# EAGLE board Passthrough Meter (EAGLE 5.06)
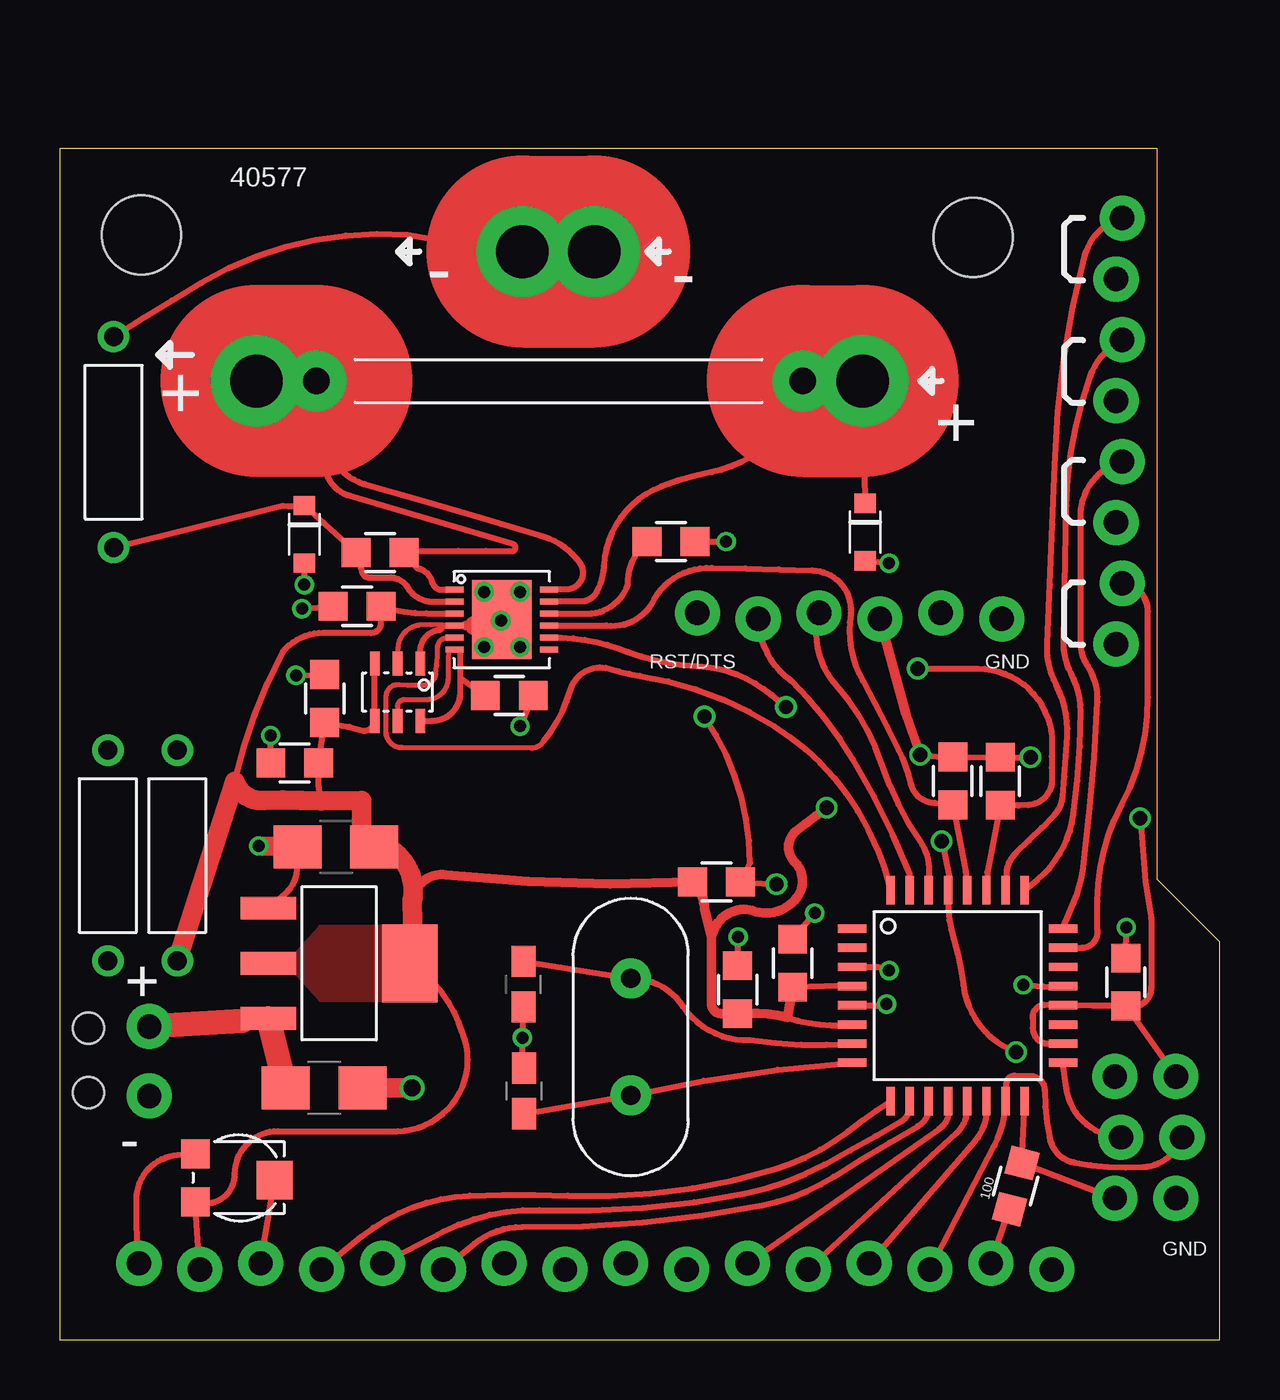
[diagram p0: board, top side]
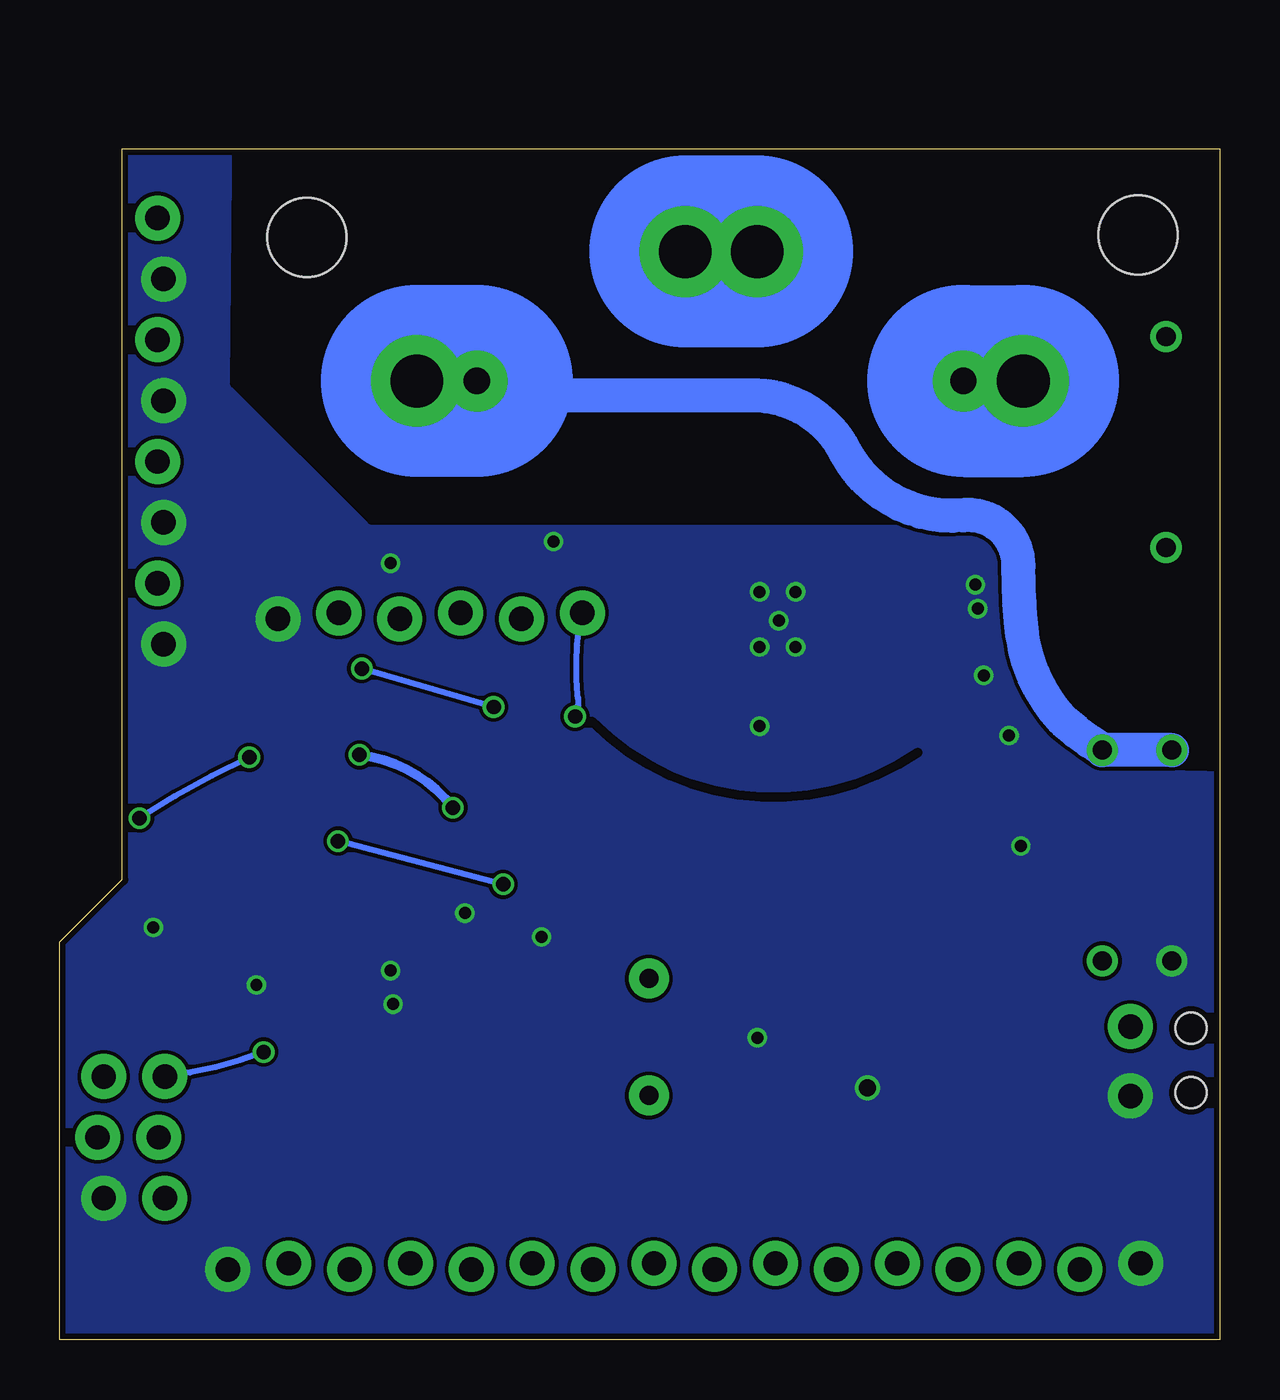
[diagram p1: board, bottom side, seen from below]

Size 48.4 x 49.7 mm. Coordinates in mm from the lower left corner, seen from the top.
Outline: 0,0 48.4,0 48.4,16.6 45.8,19.2 45.8,49.7 0,49.7 0,0
Copper layers (1*16): Top 0.035mm / dielectric 1.5mm / Bottom 0.035mm
Design rules "Fusion_eagle_rule_v1.1": minimum track width 6mil, minimum drill 12mil, track to track 6mil, track to pad 6mil, pad to pad 6mil, via to via 6mil, smd to smd 0mil, copper to edge 10mil, drill to drill 10mil, minimum pad ring 10mil, minimum via ring 6mil, stop-mask expansion 2mil, vias tented up to drill 100mil, thermal gap 10mil
Holes 1.3 mm at 1.2,10.3 1.2,13
bRestrict: area -0.5,23.9 to 41.1,50.8; 2 lines

## Footprints (pad centres in the part's own frame; a part is rotated, then mirrored left to right if it is on the bottom)
0805 = smd 1.2 x 1.2: 1 -1,0; 2 1,0
0603-CAP = smd 1.3 x 1: 1 -0.95,0; 2 0.95,0
1206 = smd 2 x 1.8: 1 -1.6,0; 2 1.6,0
1X08_LOCK = drill 1.016 pad 1.88 round: 1 0,0.127; 2 2.54,-0.127; 3 5.08,0.127; 4 7.62,-0.127; 5 10.16,0.127; 6 12.7,-0.127; 7 15.24,0.127; 8 17.78,-0.127
1X02_LOCK = drill 1.016 pad 1.88 round: 1 -0.178,0; 2 2.718,0
1X06_LOCK = drill 1.016 pad 1.88 round: 1 0,0.127; 2 2.54,-0.127; 3 5.08,0.127; 4 7.62,-0.127; 5 10.16,0.127; 6 12.7,-0.127
1X03_LOCK = drill 1.016 pad 1.88 round: 1 0,0.127; 2 2.54,-0.127; 3 5.08,0.127
OAR5 = drill 1.1 pad 2.54 round: 1 -10.2,0; 2 10.1,0
PRECISION-R1 = drill 0.8 round: 1 4.4,0; 2 -4.4,0
HC49US = drill 0.8 pad 1.676 round: 1 -2.44,0; 2 2.44,0
SOT23-6LEAD = smd 0.4 x 1: 1 -0.95,-1.2; 2 0,-1.2; 3 0.95,-1.2; 4 0.95,1.2; 5 0,1.2; 6 -0.95,1.2
TQFP32 = smd 1.2 x 0.35: 1 -4.4,2.8; 2 -4.4,2; 3 -4.4,1.2; 4 -4.4,0.4; 5 -4.4,-0.4; 6 -4.4,-1.2; 7 -4.4,-2; 8 -4.4,-2.8; 17 4.4,-2.8; 18 4.4,-2; 19 4.4,-1.2; 20 4.4,-0.4; 21 4.4,0.4; 22 4.4,1.2; 23 4.4,2; 24 4.4,2.8 | smd 0.35 x 1.2: 9 -2.8,-4.4; 10 -2,-4.4; 11 -1.2,-4.4; 12 -0.4,-4.4; 13 0.4,-4.4; 14 1.2,-4.4; 15 2,-4.4; 16 2.8,-4.4; 25 2.8,4.4; 26 2,4.4; 27 1.2,4.4; 28 0.4,4.4; 29 -0.4,4.4; 30 -1.2,4.4; 31 -2,4.4; 32 -2.8,4.4
MPLD-W-12-4X4 = smd 0.25 x 0.75: 1 -1.25,-1.98; 2 -0.75,-1.98; 3 -0.25,-1.98; 4 0.25,-1.98; 5 0.75,-1.98; 6 1.25,-1.98; 7 1.25,1.98; 8 0.75,1.98; 9 0.25,1.98; 10 -0.25,1.98; 11 -0.75,1.98; 12 -1.25,1.98 | smd 3.3 x 2.5: PAD 0,0
SOD-323 = smd 0.8 x 0.9: 1 -1.2,0; 2 1.2,0
TC33X-2 = smd 1.2 x 1.2: 1 -1,-1.8; 3 1,-1.8 | smd 1.6 x 1.5: 2 0.1,1.5
THROUGH_HOLE_2.2MM = drill 2.2 pad 3.81 round: P$1 0,0
STAND-OFF = hole 3.302: 0,0
ZLDO1117 = smd 0.95 x 2.3: 1 -2.3,-3; 2 0,-3; 3 2.3,-3 | smd 3.25 x 2.3: 4 0,2.9

## Placement (x,y rotation side)
100  [0805]  39.89,6.41 75 top
C1  18pF  [0603-CAP]  19.34,14.83 90 top
C2  18pF  [0603-CAP]  19.36,10.38 270 top
C3  0.1uF  [0805]  28.28,14.6 270 top
C4  0.1uF  [0805]  30.58,15.71 270 top
C5  0.1uF  [0805]  44.48,14.92 270 top
C6  .1uF  [0805]  11.05,26.75 90 top
C7  1uF  [0805]  9.8,24.06 180 top
C8  .1uF  [0805]  18.75,26.88 0 top
C9  10uF  [1206]  11.52,20.55 180 top
C10  10uF  [1206]  11.02,10.5 180 top
C11  .1uF  [0805]  12.4,30.6 180 top
C12  2.2nF  [0805]  25.5,33.3 0 top
JP1  [1X08_LOCK]  21.08,3.06 180 top
JP2  [1X08_LOCK]  41.39,3.05 180 top
JP3  [1X02_LOCK]  3.73,10.34 90 top
JP4  [1X08_LOCK]  44.2,46.8 270 top
JP5  [1X06_LOCK]  26.6,30.2 0 top
JP6  [1X03_LOCK]  44.15,5.9 90 top
JP7  [1X03_LOCK]  46.7,5.9 90 top
R1  .005  [OAR5]  20.9,40 0 top
R3  200k  [PRECISION-R1]  2.24,37.45 90 top
R4  2k  [0805]  13.36,32.84 180 top
R5  [0805]  39.24,23.3 90 top
R6  [0805]  37.26,23.31 270 top
R7  10k  [0805]  27.4,19.1 0 top
R8  200k  [PRECISION-R1]  2,20.2 90 top
R9  200k  [PRECISION-R1]  4.9,20.2 270 top
U$1  HC49US  [HC49US]  23.82,12.63 90 top
U$2  ADR3412  [SOT23-6LEAD]  14.09,27.02 180 top
U$3  ATMEGA328TQFP  [TQFP32]  37.46,14.35 0 top
U$4  SX8723  [MPLD-W-12-4X4]  18.44,30.04 270 top
U$5  ZENER_DIODE-SOD-323  [SOD-323]  10.2,33.6 270 top
U$6  TRIMPOTTC33X-2  [TC33X-2]  7.45,6.75 270 top
U$7  THROUGH_HOLE-3MM  [THROUGH_HOLE_2.2MM]  19.3,45.4 0 top
U$8  THROUGH_HOLE-3MM  [THROUGH_HOLE_2.2MM]  22.3,45.4 0 top
U$9  THROUGH_HOLE-3MM  [THROUGH_HOLE_2.2MM]  33.5,40 180 top
U$10  THROUGH_HOLE-3MM  [THROUGH_HOLE_2.2MM]  8.2,40 180 top
U$11  [STAND-OFF]  3.4,46.1 0 top
U$12  [STAND-OFF]  38.1,46 0 top
U$13  5V-LDO-ZLDO1117  [ZLDO1117]  11.7,15.7 270 top
U$15  ZENER_DIODE-SOD-323  [SOD-323]  33.6,33.7 270 top

## Library data of the parts
100 C1-C12 JP1-JP7 R1 R3-R9 U$1-U$13 U$15 = 1dah

## Nets
5V: C3.2 C4.2 C5.2 C6.1 C7.1 C9.1 C11.1 JP1.7 JP5.4 JP7.3 R5.2 R6.1 R7.1 R9.1 U$2.3 U$2.4 U$3.4 U$3.6 U$3.18 U$3.20 U$4.3 U$6.3 U$13.2 U$13.4
9V: C10.2 JP3.2 U$13.3
GND: C1.1 C2.1 C3.1 C4.1 C5.1 C6.2 C7.2 C8.2 C9.2 C10.1 C11.2 C12.2 JP1.8 JP2.1 JP3.1 JP4.2 JP4.4 JP4.6 JP4.8 JP5.6 JP7.1 R8.2 U$2.1 U$2.2 U$3.3 U$3.5 U$3.21 U$4.4 U$4.PAD U$5.2 U$6.1 U$13.1 U$15.2
N$1: C2.2 U$1.1 U$3.8
N$2: C1.2 U$1.2 U$3.7
N$4: C8.1 U$2.5 U$2.6 U$4.6
N$6: JP1.5 U$3.9
N$7: JP2.6 U$3.12
N$8: JP2.5 U$3.13
N$9: JP2.4 U$3.14
N$10: JP2.3 JP7.2 U$3.15
N$11: 100.2 JP6.1 U$3.16
N$12: JP1.4 U$3.10
N$13: JP1.6 U$6.2
N$14: JP1.3 U$3.11
N$15: 100.1 JP2.2
N$16: JP4.3 U$3.25
N$17: JP4.1 U$3.26
N$18: JP4.5 U$3.24
N$19: JP4.7 U$3.23
N$20: JP6.2 U$3.17
N$21: C12.1 U$4.10
N$30: R3.2 R4.2 U$4.2 U$5.1
READY: U$3.32 U$4.5
RESET: JP5.1 JP6.3 R7.2 U$3.29
RX: JP5.3 U$3.30
SCL: R6.2 U$3.28 U$4.9
SDA: R5.1 U$3.27 U$4.8
TESTGND: R3.1 U$7.P$1 U$8.P$1
TESTINPUT: R1.2 R8.1 R9.2 U$4.11 U$9.P$1 U$15.1
TESTOUTPUT: R1.1 R4.1 U$4.1 U$4.12 U$10.P$1
TX: JP5.2 U$3.31

## Tracks (layer width: path | path; a pad name or v marks a point on that pad's centre or on a via)
5V  (via drill 0.6)
  Top 0.254: JP1.7 U$6.3 arc110 7.3,6.9 arc-90 9.1,8.7 14.1,8.7 arc111 16.8,12.8 arc40 U$13.4 | 13.3,20.7 C9.1 12.6,21.2 | 10.89,22.47 10.8,23.1 C7.1 C6.1 12.07,25.57 12.7,25.4 arc87 U$2.4 U$2.3 | 27.6,13.6 C3.2 | 30.37,13.44 arc25 U$3.6 | C4.2 32.55,14.78 arc-18 U$3.4 | U$3.18 arc3 41.27,12.35 arc-92 40.6,13 40.6,13.4 arc-99 41.09,13.96 U$3.20 43.09,13.93 C5.2 | v35.9,24.4 arc7 R6.1 R5.2 arc1 v40.5,24.3 | v45.08,21.76 45.3,19.1 arc-2 45.54,17.56 45.54,14.72 arc-111 C5.2 | C5.2 JP7.3 | 7.3,23.3 arc-14 9.3,28.7 arc-50 11,29.5 12.9,29.5 arc103 13.4,29.9 C11.1 arc17 15.3,30.3 U$4.3
  Top 0.406: 27.6,13.6 arc-103 27.2,14.1 27.2,16.8 | C3.2 arc-18 30.37,13.44 C4.2 | 27.2,16.8 26.9,18 arc44 R7.1 arc-9 16.1,19.4 arc78 14.8,18.6 14.7,18.3 | v35.9,24.4 35.3,26.1 JP5.4 | 27.2,16.8 27.4,17.3 arc-75 28.9,17.9 arc85 30.9,18.7 arc64 30.7,19.9 arc-98 30.7,21.2 arc1 v32,22.2
  Top 0.813: 13.3,20.7 arc-85 14.7,18.3 arc-8 U$13.4 | 12.6,21.2 12.6,22.5 10.89,22.47 arc5 8.5,22.5 arc-76 7.3,23.3 R9.1
  Bottom 0.254: v40.5,24.3 arc-8 v45.08,21.76
  Bottom 0.406: v32,22.2 arc-46 v35.9,24.4
  pour Top (no thermals): 7.7,16 9.8,16 10.9,17.2 15.6,17.2 15.6,14.2 10.9,14.2 9.8,15.4 7.7,15.4
9V
  Top 0.406: 7.6,13.3 arc44 U$13.3
  Top 1.016: JP3.2 7.6,13.3 | U$13.3 C10.2
GND  (via drill 0.5, 0.7)
  Top 0.203: U$2.1 15.04,28.74 | U$2.2 14.1,28.8 arc-82 14.98,29.81 arc-11 U$4.4
  Top 0.254: U$6.1 4.9,7.7 arc85 3.2,5.9 arc6 JP1.8 | v9.85,27.72 C6.2 | C1.1 v19.3,12.6 arc9 C2.1 | C3.1 v28.3,16.8 | C4.1 v31.5,17.8 | U$3.3 33.95,15.56 arc-29 v34.6,15.4 | U$3.5 33.96,13.94 arc14 v34.5,14 | v40.2,14.8 41.01,14.74 arc10 U$3.21 | C8.2 v19.2,25.6 | C5.1 v44.5,17.2 | C7.2 v8.79,25.21 | U$13.1 9.4,18.6 arc50 9.9,19.7 arc-3 C9.2 | v10.1,30.5 C11.2 | 16.93,29.79 U$4.4 15.96,29.8 arc-88 15.8,29.61 arc81 15.04,28.74 | U$5.2 v10.2,31.5 | U$15.2 v34.6,32.4 | v18.4,30 arc59 U$4.PAD | C12.2 v27.8,33.3
  Top 0.406: 16.93,29.79 arc4 17.3,29.8
  Top 0.813: C10.1 v14.7,10.5 | C9.2 v8.3,20.6 | 17.3,29.8 arc10 v18.4,30
  other vias: 17.7,28.9 19.2,31.2 17.7,31.2 19.2,28.9
  pour Bottom (no thermals): -6.2,-6.8 60.5,-6.8 60.5,57.7 -6.2,57.7
N$1
  Top 0.254: C2.2 U$1.1 arc-9 U$3.8
N$2
  Top 0.254: C1.2 U$1.2 arc-58 26,13.9 arc59 28.8,12.5 arc13 U$3.7
N$4
  Top 0.203: U$2.5 14.09,26.42 arc-96 14.4,26.7 15.3,26.7 arc91 16.2,27.62 16.2,28.34 16.21,28.79
  Top 0.254: 16.21,28.79 U$4.6 16.71,28.79 16.71,27.6 | U$2.6 15.52,25.82 arc94 16.71,27.07 16.71,27.6 | 16.71,27.6 C8.1
N$6
  Top 0.254: JP1.5 12.6,4.3 arc-37 17.1,6 arc-4 21.2,6 arc19 29.8,7.1 arc21 32.9,8.7 arc-5 U$3.9
N$7
  Top 0.254: JP2.6 36.7,8.8 arc75 U$3.12
N$8
  Top 0.254: JP2.5 37.4,8.6 arc57 U$3.13
N$9
  Top 0.254: JP2.4 38.2,8.3 arc51 U$3.14
N$10
  Top 0.254: JP2.3 39,8.1 arc27 U$3.15 39.5,10.7 arc-100 39.9,11 40.5,11 arc-90 41.1,10.4 arc11 41.3,8.4 arc67 42.3,7.4 arc15 45.2,7.2 arc68 JP7.2
N$11
  Top 0.254: U$3.16 100.2 JP6.1
N$12
  Top 0.254: JP1.4 16,4.5 arc-29 20,5.4 arc13 28.6,6.1 arc17 31.9,7.3 arc1 35.1,9.1 arc74 U$3.10
N$13
  Top 0.254: JP1.6 U$6.2
N$14
  Top 0.254: JP1.3 17.3,4 arc-40 19.3,4.7 arc12 29.3,5.6 arc21 32.3,6.8 arc-3 35.8,8.9 arc74 U$3.11
N$15
  Top 0.254: JP2.2 100.1
N$16
  Top 0.254: U$3.25 40.8,19.2 arc42 42.3,21.9 arc8 42.6,26.2 arc28 42.2,27.8 arc-32 41.9,29.2 42,34.8 arc-19 43,40.2 arc-42 JP4.3
N$17
  Top 0.254: U$3.26 39.51,19.47 arc-42 39.9,20.3 arc3 41.5,21.9 arc38 41.85,22.67 arc2 42.04,25.17 arc31 41.58,27.31 arc-31 41.2,29.04 arc1 41.51,36.5 arc-13 42.78,45.24 arc-60 JP4.1
N$18
  Top 0.254: U$3.24 42.3,18.2 arc16 42.7,19.7 arc4 43.3,26.6 arc35 42.9,28.1 arc-37 42.6,29.3 42.6,34.4 arc-75 JP4.5
N$19
  Top 0.254: U$3.23 42.64,16.35 arc97 43.3,17.1 43.3,18.3 arc-28 44.3,22.3 arc29 45.4,26.8 arc-1 45.4,30.4 arc87 JP4.7
N$20
  Top 0.254: U$3.17 42,10.5 arc81 JP6.2
N$21
  Top 0.254: U$4.10 22.2,30.3 arc64 23.7,31.5 arc-50 C12.1
N$30
  Top 0.254: U$4.2 arc4 15.61,30.79 arc-61 14.5,31.4 arc59 13.8,31.8 13,31.8 arc-99 12.6,32.1 R4.2 U$5.1 arc-13 9.3,34.8 R3.2
READY
  Top 0.203: U$4.5 16.17,29.29 arc90 15.76,28.88 arc-8 15.68,27.77 arc-81 15.16,27.31 arc-5 14.16,27.33 arc98 13.61,26.8 13.61,25.36 arc93 14.3,24.7 19.6,24.7 arc74 20.2,25
  Top 0.254: U$3.32 arc23 32.8,22.8 arc22 29.8,25.6 arc23 24.2,27.7 arc-8 22.9,28 arc90 21.3,27.1 arc-24 20.2,25
RESET  (via drill 0.6)
  Top 0.254: v36.8,20.8 37.1,19.4 U$3.29 arc20 37.3,16.7 arc-10 37.7,14.8 arc63 v39.9,12 | v29.9,19 R7.2 28.8,19.9 arc34 v26.9,26
  Bottom 0.254: v29.9,19 v36.8,20.8 | v26.9,26 arc-40 26.8,26.9 arc18 JP5.1 | v39.9,12 arc13 JP6.3
RX
  Top 0.254: U$3.30 36.28,19.53 arc36 35.9,20.8 arc-16 34.3,24 arc23 32.4,27.3 arc-56 JP5.3
SCL
  Top 0.254: U$3.28 37.8,19.5 R6.2 arc8 36.5,22.4 arc-76 35.5,23.2 arc12 35,24.6 arc3 33.5,27.5 arc-37 33,30.3 arc93 31.4,32.1 arc1 27.2,32.2 arc68 24.7,30.7 arc-65 22.8,29.8 U$4.9
SDA  (via drill 0.6)
  Top 0.254: U$3.27 38.7,19.5 R5.1 arc7 40.4,22.3 arc88 41.4,23.4 arc-4 41.4,24.8 arc92 38.3,28 v35.8,28 | v30.3,26.4 29.7,26.9 arc37 26.6,28.1 arc-18 23.7,28.7 arc8 22.4,29.1 arc16 U$4.8
  Bottom 0.254: v30.3,26.4 v35.8,28
TESTGND
  Top 0.254: U$7.P$1 arc-3 14.5,46.1 arc35 5.9,44.1 arc2 R3.1
  Top 8: U$7.P$1 U$8.P$1
  Bottom 8: U$7.P$1 U$8.P$1
TESTINPUT
  Top 0.254: 29.8,36.6 R1.2 arc-68 27.2,36.2 arc10 25.1,35.6 arc66 22.7,32.3 arc-24 22.4,31.2 arc-66 21.7,30.8 U$4.11 | U$9.P$1 U$15.1
  Top 8: R1.2 U$9.P$1
  Bottom 1.422: R1.2 arc-26 28.4,39.4 19.7,39.4 arc66 15.6,37 arc-67 10.7,34.4 arc96 8.4,32.3 arc-5 8.3,30 arc-40 6.5,25.8 arc-8 R9.2 R8.1
  Bottom 8: R1.2 U$9.P$1
TESTOUTPUT
  Top 0.254: U$4.1 15.8,31.3 arc-51 15.5,31.7 arc57 14.9,32.2 R4.1 14.9,32.9 arc1 15.5,32.9 arc-1 18.9,32.9 arc144 18.9,33.2 12.1,35.2 arc-82 11.1,36.7 arc29 R1.1 arc15 10.9,37.8 arc62 12.7,35.7 arc-1 20.2,33.5 arc-39 21.7,32.4 arc-126 21.1,31.3 arc5 U$4.12
  Top 8: R1.1 U$10.P$1
  Bottom 8: R1.1 U$10.P$1
TX
  Top 0.254: U$3.31 35.46,19.44 arc9 33.1,24.2 arc15 30.5,27.5 arc-53 JP5.2

## Text on the board
tPlace: 40577 | - | - | + | + | RST/DTS | GND | + | - | GND